# Altium PCB PCB2.PcbDoc
Units mm, origin at the board's own origin, x right, y up, seen from the top; angles counter-clockwise.
Board outline 100 x 76.5 mm, 2 copper layers (Top Layer, Bottom Layer), stack 1.571 mm thick; 101 components, 51 nets, 210 pads, 31 vias.
Unrouted connection lines stored in the file: 5.
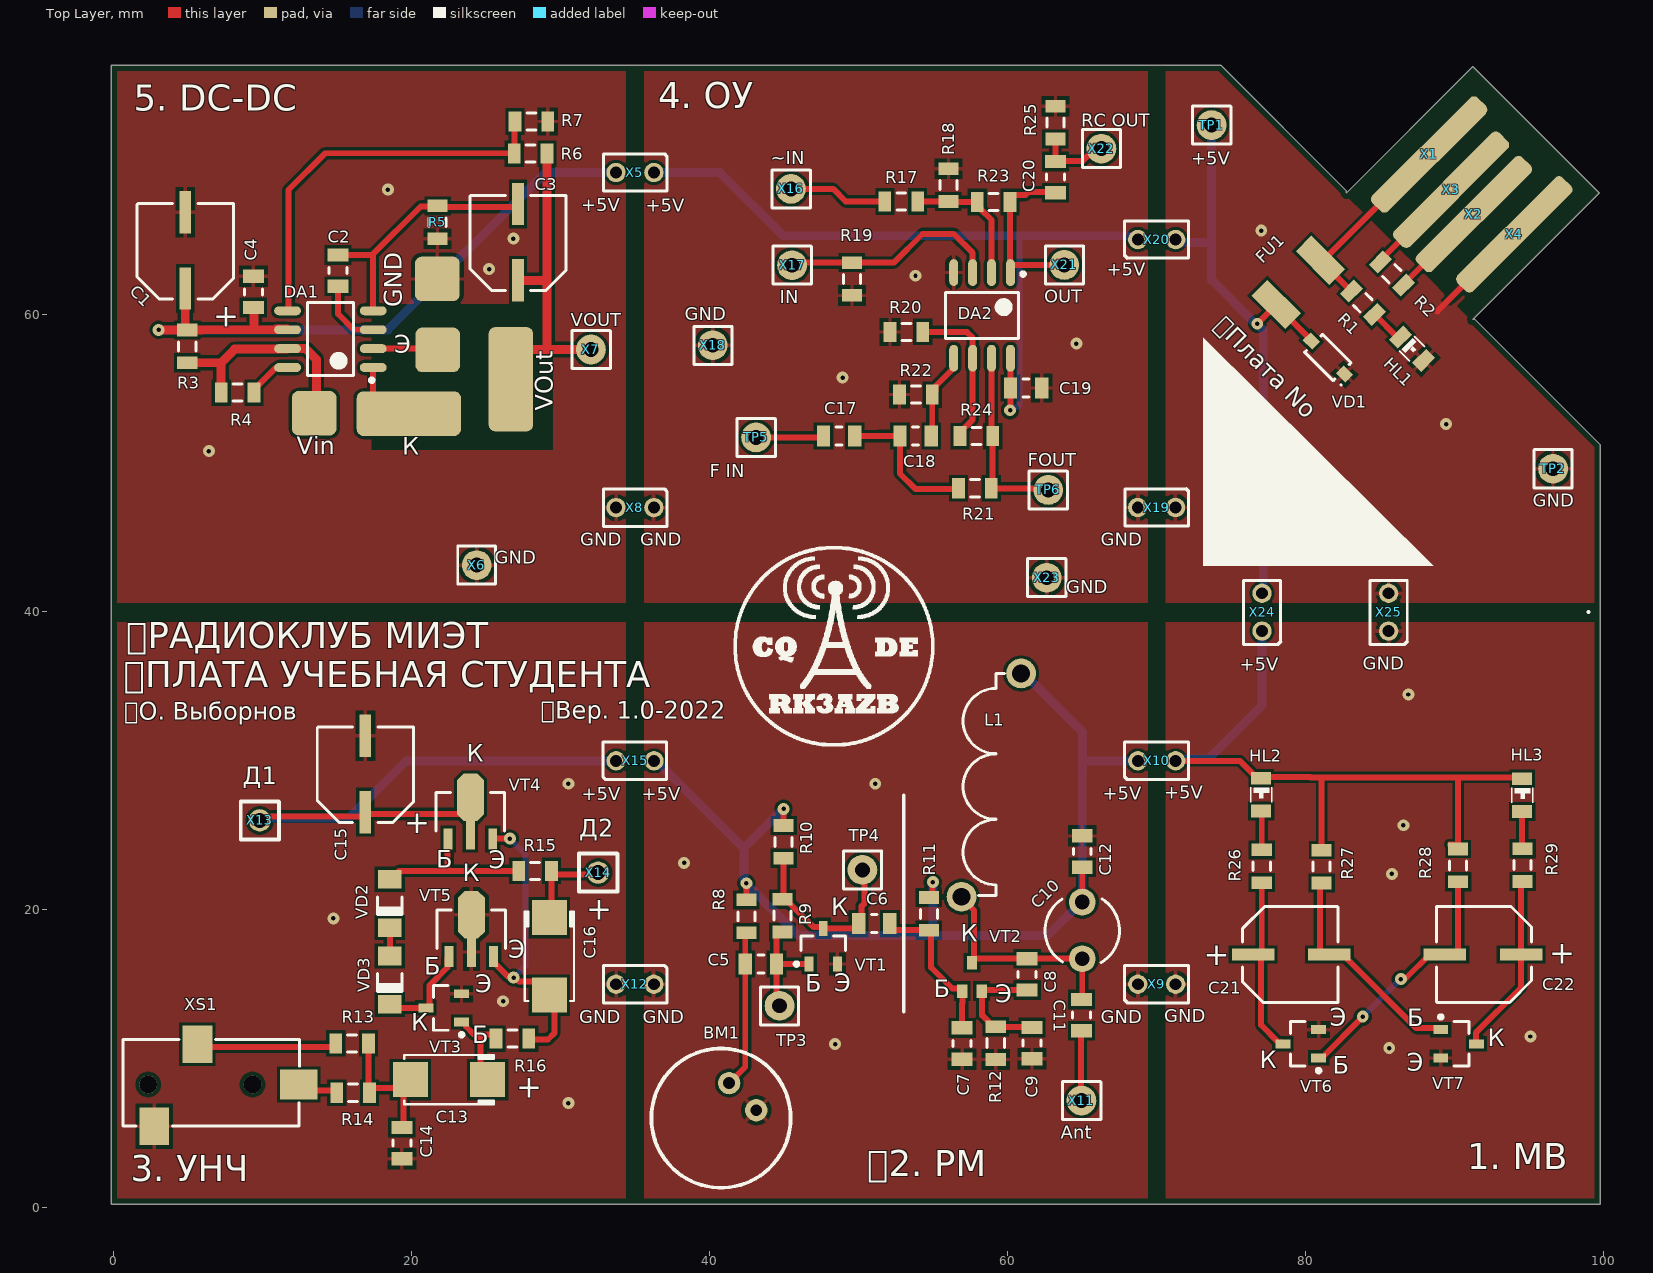
[diagram p0: Top Layer view]
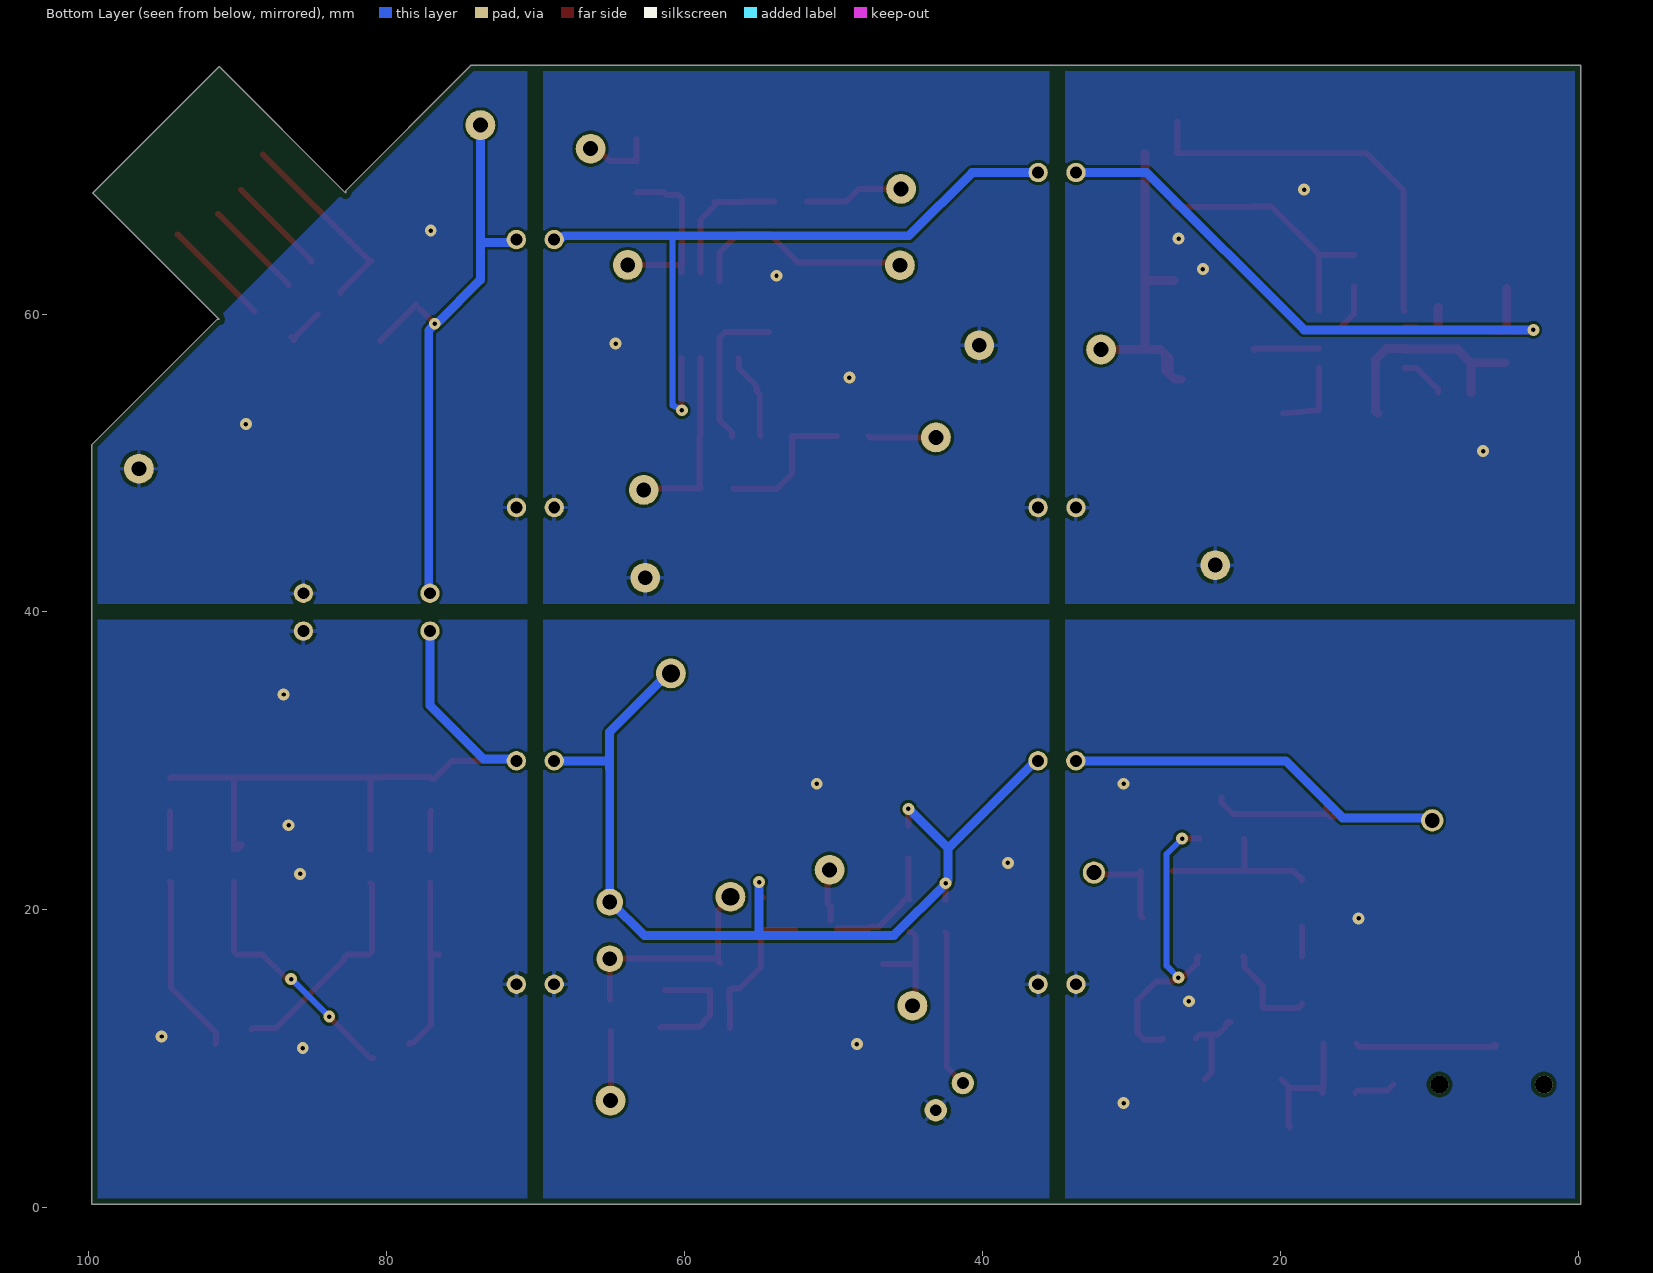
[diagram p1: Bottom Layer view, seen from below]
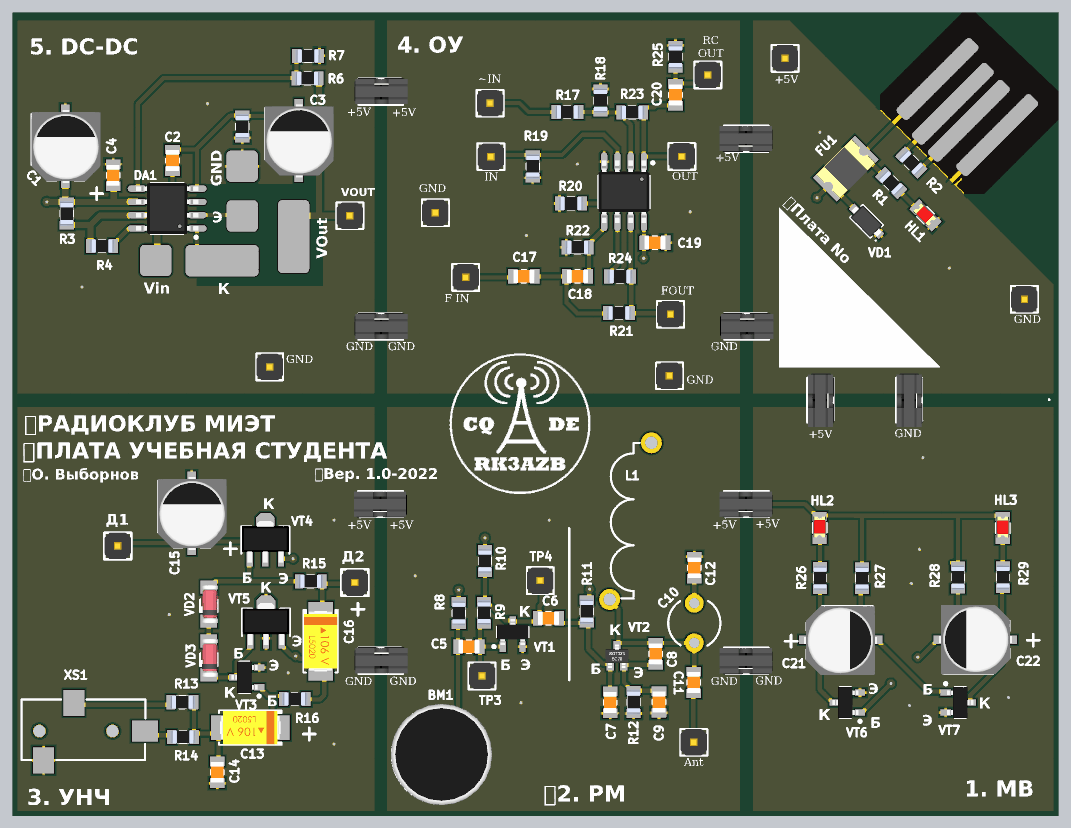
[diagram p2: 3D render of the assembled board from above, using the file's embedded part models]

## Layer stack, top to bottom
Top Solder: solder mask 0.0102, Solder Resist, Dk 3.5
Top Layer: signal copper 0.0356
Dielectric 1: dielectric 1.5, FR-4, Dk 4.8
Bottom Layer: signal copper 0.0356
Bottom Solder: solder mask 0.0102, Solder Resist, Dk 3.5

## Board outline
-0.178,0.214 -0.178,76.713 74.322,76.713 82.766,68.27 82.766,68.128 91.251,76.613 99.736,68.128 91.251,59.642 91.393,59.642 99.822,51.214 99.822,0.214

## Design rules (kind name [scope] priority, off if disabled: settings)
BoardOutlineClearance [All] p1: gap=0.4 ignorepadtopadclearanceinfootprint=FALSE
Clearance [All] p1: gap=0.2 ignorepadtopadclearanceinfootprint=FALSE except(0.125: Arc-Arc Arc-Track Arc-SMDPad Arc-THPad Arc-Via Arc-Text Track-Track Track-SMDPad Track-THPad Track-Via Track-Text SMDPad-Via SMDPad-Text THPad-THPad THPad-Via THPad-Text Via-Via Via-Text Fill-Text Poly-Text Region-Text Text-Text; 0.25: Arc-Hole Track-Hole SMDPad-Hole THPad-Hole Via-Hole Fill-Hole Poly-Hole Region-Hole Text-Hole)
ComponentClearance [All] p1: gap=0 collisioncheckmode=3 verticalgap=0.254 showdistances=FALSE
DiffPairsRouting [All] p1: maxlimit=0.254 minlimit=0.15 mostfreqgap=0.254 toplayer_minwidth=0.2 toplayer_maxwidth=0.381 toplayer_prefwidth=0.254 bottomlayer_minwidth=0.2 bottomlayer_maxwidth=0.381 bottomlayer_prefwidth=0.254 maxuncoupledlength=12.7
HoleSize [All] p1: absolutevalues=TRUE maxlimit=100 minlimit=0.3 maxpercent=80.000 minpercent=20.000
MinimumAnnularRing [All] p1: minimumring=0.15
MinimumSolderMaskSliver [All] p1: minsoldermaskwidth=0.15
PolygonConnect [All] p1: thpad.connectstyle=Relief thpad.reliefconductorwidth=0.254 thpad.reliefentries=4 thpad.polygonreliefangle="90 Angle" thpad.airgapwidth=0.254 smdpad.connectstyle=Relief smdpad.reliefconductorwidth=0.254 smdpad.reliefentries=4 smdpad.polygonreliefangle="90 Angle" smdpad.airgapwidth=0.254 via.connectstyle=Direct via.reliefconductorwidth=0.254 via.reliefentries=4 via.polygonreliefangle="90 Angle" via.airgapwidth=0.254
RoutingVias [All] p1: holewidth=0.4 width=0.8 viastyle="Through Hole" minholewidth=0.3 minwidth=0.8 maxholewidth=0.8 maxwidth=1.27
SilkToSilkClearance [All] p1 off: silktosilkclearance=0.15
SilkToSolderMaskClearance [IsPad] p1: minsilkscreentomaskgap=0.1 clearancetoexposedcopper=TRUE
SolderMaskExpansion [All] p1: expansion=0.102 istentingtop=FALSE
Width [All] p1: maxlimit=1 minlimit=0.125 preferedwidth=0.254
24 further rules are at their usual default settings.

## Classes and differential pairs
component class Amplifier: C13 C14 C15 C16 R13 R14 R15 R16 VD2 VD3 VT3 VT4 VT5 X12 X13 X14 X15 XS1
component class Multivibrator: C21 C22 HL2 HL3 R26 R27 R28 R29 VT6 VT7 X24 X25
component class Operational_amplifier: C17 C18 C19 C20 DA2 R17 R18 R19 R20 R21 R22 R23 R24 R25 TP5 TP6 X16 X17 X18 X19 X20 X21 X22 X23
component class Radio_bug: BM1 C5 C6 C7 C8 C9 C10 C11 C12 L1 R8 R9 R10 R11 R12 TP3 TP4 VT1 VT2 X9 X10 X11
component class DC-DC: C1 C2 C3 C4 DA1 R3 R4 R5 R6 R7 X5 X6 X7 X8
component class USB_Protection: FU1 HL1 R1 R2 TP1 TP2 VD1 X1 X2 X3 X4

## Components (designator, comment, footprint, x,y, rotation, side; value= is the part's Value field where it differs from the comment)
BM1 "EM6050P" EM6050P 42.204,7.369 r315 top
C1 "100 мк" SMD_al_cap_0605_6.3 4.799,61.715 r90 top value=100µF
C2 "680" C_0805 15.054,62.912 r270 top value=0.1µF
C3 "100 мк" SMD_al_cap_0605_6.3 27.138,62.265 r90 top value=100µF
C4 "0,1" C_0805 9.371,61.491 r90 top value=0.1µF
C5 "0,1 мк" C_0805 43.451,16.354 r0 top value=0.1µF
C6 "0,1 мк" C_0805 51.062,19.07 r0 top value=0.1µF
C7 "10n" C_0805 56.963,11.014 r270 top value=0.1µF
C8 "10" C_0805 61.33,15.662 r270 top value=0.1µF
C9 "47" C_0805 61.65,11.045 r270 top value=0.1µF
C10 "КТ4-35" KТ4-35 65.029,20.512 r270 top
C11 "10" C_0805 64.975,12.923 r90 top value=0.1µF
C12 "0,1" C_0805 65.029,23.906 r90 top value=0.1µF
C13 "10мк" C_CASE 23.509,8.592 r180 top value=100µF
C14 "0,033мк" C_0805 19.341,4.327 r90 top value=0.1µF
C15 "100 мк" SMD_al_cap_0605_6.3 16.887,26.559 r90 top value=100µF
C16 "100 мк" C_CASE 29.25,17.875 r270 top value=100µF
C17 "10" C_0805 48.705,51.817 r0 top value=0.1µF
C18 "10" C_0805 53.842,51.814 r0 top value=0.1µF
C19 "0,1" C_0805 61.261,55.035 r0 top value=0.1µF
C20 "0,10" C_0805 63.226,69.195 r90 top value=0.1µF
C21 "100 мк" SMD_al_cap_0605_6.3 76.5,17 r0 top value=100µF
C22 "100 мк" SMD_al_cap_0605_6.3 94.5,17 r180 top value=100µF
DA1 "MC34063" SO-8 14.544,58.311 r180 top
DA2 "LM358" SO-8 58.302,59.911 r270 top
FU1 "MF-MSMF020" "FUSE 1812" 79.467,62.053 r225 top
HL1 "BL-LS0805UHR" LED_0805_RED 87.174,57.667 r315 top
HL2 "BL-LS0805UHR" LED_0805_RED 77.037,27.726 r270 top
HL3 "BL-LS0805UHR" LED_0805_RED 94.568,27.7 r270 top
L1 "Inductor" Inductor 56.922,20.871 r90 top
R1 "1к" R_0805 85.822,62.713 r135 top value="10 к"
R2 "1к" R_0805 83.874,60.757 r315 top value="10 к"
R3 "1" R_0805 4.93,57.83 r90 top value="10 к"
R4 "180" R_0805 8.313,54.721 r0 top value="10 к"
R5 "0" R_0805 21.741,66.164 r90 top value="10 к"
R6 "10 к" R_0805 27.992,70.77 r180 top
R7 "10 к" R_0805 28.042,72.926 r0 top
R8 "10 к" R_0805 42.474,19.562 r270 top
R9 "1М" R_0805 44.899,19.603 r270 top value="10 к"
R10 "4.7к" R_0805 44.975,24.559 r270 top value="10 к"
R11 "22k" R_0805 54.727,19.726 r270 top value="10 к"
R12 "100" R_0805 59.222,11.047 r270 top value="10 к"
R13 "1к" R_0805 16.002,11.03 r0 top value="10 к"
R14 "1к" R_0805 16.072,7.709 r0 top value="10 к"
R15 "510" R_0805 28.294,22.61 r0 top value="10 к"
R16 "100к" R_0805 26.766,11.344 r180 top
R17 "1к" R_0805 52.876,67.557 r180 top value="10 к"
R18 "1к" R_0805 56.044,68.657 r90 top value="10 к"
R19 "0?" R_0805 49.561,62.35 r270 top value="10 к"
R20 "10 к" R_0805 53.22,58.796 r180 top
R21 "10 к" R_0805 57.815,48.304 r0 top
R22 "10 к" R_0805 53.858,54.595 r180 top
R23 "1к" R_0805 59.08,67.521 r180 top value="10 к"
R24 "10 к" R_0805 57.92,51.802 r180 top
R25 "1 к" R_0805 63.226,72.849 r90 top value="10 к"
R26 "300" R_0805 77.081,22.922 r270 top value="10 к"
R27 "27 к" R_0805 81.1,22.9 r270 top value="10 к"
R28 "27 к" R_0805 90.268,22.981 r270 top value="10 к"
R29 "300" R_0805 94.6,23 r270 top value="10 к"
TP1 "Test_Point_1" PLS-1#1 73.713,72.688 r0 top
TP2 "Test_Point_1" PLS-1#1 96.643,49.61 r90 top
TP3 "Test_Point_1" PLS-1#1 44.702,13.553 r270 top
TP4 "Test_Point_1" PLS-1#1 50.264,22.68 r0 top
TP5 "Test_Point_1" PLS-1#1 43.127,51.715 r0 top
TP6 "Test_Point_1" PLS-1#1 62.743,48.187 r0 top
VD1 "SMF7.0A" SOD-123F 81.521,57.081 r135 top
VD2 "1N4148W" SOD-80 18.534,20.423 r270 top
VD3 "1N4148W" SOD-80 18.531,15.269 r270 top
VT1 "BC847" SOT23 47.637,17.553 r90 top
VT2 "PMST2369" SOT-323 57.623,16.437 r180 top
VT3 "BC847" SOT23 22.154,13.41 r180 top
VT4 "BCX54-16,115" SOT89 23.948,26.55 r90 top
VT5 "BCX51-16,115" SOT89 24.009,18.671 r90 top
VT6 "BC847" SOT23 79.7,11 r180 top
VT7 "BC847" SOT23 90.3,11 r0 top
X1 "X" KT_1 88.322,70.713 r225 top
X2 "X" KT_1 91.322,66.713 r45 top
X3 "X" KT_1 89.792,68.346 r45 top
X4 "X" KT_1 94.037,65.348 r45 top
X5 "0 Ом" jumper 35,69.5 r270 top
X6 "КТ" PLS-1#1 24.37,43.137 r90 top
X7 "КТ" PLS-1#1 32.041,57.618 r0 top
X8 "0 Ом" jumper 35,47 r270 top
X9 "0 Ом" jumper 70.025,15 r90 top
X10 "0 Ом" jumper 70.025,30 r90 top
X11 "КТ" PLS-1#1 64.975,7.188 r0 top
X12 "0 Ом" jumper 35,15 r270 top
X13 "КТ" PLS-1#2 9.8,26 r0 top
X14 "КТ" PLS-1#2 32.518,22.494 r0 top
X15 "0 Ом" jumper 35,30 r90 top
X16 "КТ" PLS-1#1 45.468,68.404 r0 top
X17 "КТ" PLS-1#1 45.545,63.278 r0 top
X18 "КТ" PLS-1#1 40.218,57.901 r0 top
X19 "0 Ом" jumper 70.027,47.008 r270 top
X20 "0 Ом" jumper 70.025,65 r90 top
X21 "КТ" PLS-1#1 63.822,63.295 r0 top
X22 "КТ" PLS-1#1 66.313,71.104 r0 top
X23 "КТ" PLS-1#1 62.642,42.295 r0 top
X24 "0 Ом" jumper 77.1,39.975 r180 top
X25 "0 Ом" jumper 85.6,39.975 r180 top
XS1 "CKX3-3.5-26" CKX3-3.5-26 0.612,11.267 r0 top

## Footprints (in the part's own frame and the unit in brackets; to place one, negate y for a bottom-side part, rotate by r counter-clockwise, add the part's x,y. Pads: shape width x height; smd on the part's side, far side on the other; paste and mask are expansions set on the pad)
C_0805 [mm] "Chip Capacitor, 2-Leads, Body 2,00x1,25mm, IPC Medium Density"
  rect 0.9x1.4 smd: 1(-1.05,0) 2(1.05,0)
  silkscreen extent -0.2,-0.6 0.2,0.6, body extent -1,-0.62 1,0.63, height 0.8
C_CASE [mm]
  rect 2.35x2.35 smd: 1(-1.6,0) 2(3.6,0)
  silkscreen extent -2,-1.65 4,1.65, body extent -1.9,-1.6 3.9,1.6, height 2.6
CKX3-3.5-26 [mm]
  rect 2x2.5 smd: 2(2.1,-5.8) 3(5,-0.3)
  rect 2.5x2 smd: 4(11.8,-3)
  round 1.2 hole 1.2: HOLE(1.7,-3) HOLE(8.7,-3)
  silkscreen extent 0,-5.77 11.85,0.03
EM6050P [mm]
  round 1.5 hole 0.8: 1(-1.325,0.075) 2(1.25,0.075)
  silkscreen extent -4.72,-6.65 4.62,2.7, body extent -4.88,-6.77 4.82,2.92, height 5.15
"FUSE 1812" [mm]
  rect 1.5x3.2 smd: 1(-2.2,0) 2(2,0)
  body extent -2.51,-1.6 2.31,1.62, height 1.32
Inductor [mm]
  round 2 hole 1.2: 1(0,0) 2(15,-4)
  silkscreen extent 0.1,-2.88 15,-0.11
jumper [mm] "PLS-2 вилка штыревая 2.54мм 1x2 прямая"
  round 1.3 hole 0.8: 1(0,1.265) 2(0,-1.275)
  silkscreen extent -1.26,-2.12 1.25,2.15, body extent -1.3,-2.51 1.2,2.58, height 16.91
KT_1 [mm]
  rrect50% 10x1.5 smd: 1(0,0)
KТ4-35 [mm]
  round 1.8 hole 1: 1(0,0) 2(3.8,0)
  silkscreen extent -0.22,-2.5 4.06,2.5, body extent -0.7,-2.5 4.3,2.5, height 4.8
LED_0805_RED [mm]
  rect 0.85x1.35 smd: 1(-1.1,0) 2(1.1,0)
  silkscreen extent -0.5,-0.7 0.5,0.7, body extent -1.11,-0.62 0.91,0.63, height 1.1
PLS-1#1 [mm]
  round 2 hole 1: 1(0,0)
  silkscreen extent -1.28,-1.28 1.3,1.28, body extent -1.27,-1.27 1.27,1.27, height 8.44
PLS-1#2 [mm]
  round 1.5 hole 1: 1(0,0)
  silkscreen extent -1.28,-1.28 1.3,1.28, body extent -1.27,-1.27 1.27,1.27, height 8.44
R_0805 [mm] "Chip Resistor, 2-Leads, Body 2,10x1,30mm, IPC Medium Density"
  rect 0.85x1.35 smd: 1(-1.1,0) 2(1.1,0)
  silkscreen extent -0.3,-0.58 0.3,0.57, body extent -1.2,-0.62 1.2,0.63, height 0.55
SMD_al_cap_0605_6.3 [mm]
  rect 2.85x0.8 smd: 1(0,0) 2(5.125,0)
  silkscreen extent -0.7,-3.23 5.7,3.23, body extent -0.97,-3.35 6.03,3.25, height 5.41
SO-8 [mm] "SOIC, 8-Leads, Body 4,90x3,90mm, Pitch 1,27mm, IPC Medium Density"
  oval 1.8x0.6 smd: 1(-2.875,1.905) 2(-2.875,0.635) 3(-2.875,-0.635) 4(-2.875,-1.905) 5(2.875,-1.905) 6(2.875,-0.635) 7(2.875,0.635) 8(2.875,1.905)
  silkscreen extent -2.9,-2.45 1.55,2.88, body extent -3,-2.45 3,2.45, height 1.7
SOD-80 [mm] "MELF Diode, 2-Leads, Body 3,50x1,65mm, IPC Medium Density"
  rect 1.25x1.6 smd: 1(-1.625,0) 2(1.625,0)
  silkscreen extent -0.45,-0.82 0.75,0.83, body extent -1.85,-0.7 1.85,0.9, height 1.6
SOD-123F [mm] "SODFL, 2-Leads, Body 1.60x3.50mm, IPC Medium Density"
  rect 0.9x0.75 smd: 1(-1.575,0) 2(1.575,0)
  silkscreen extent -1.97,-0.85 1.35,0.85, body extent -1.75,-0.85 1.75,0.85, height 1.2
SOT23 [mm] "SOT23, 3-Leads, Body 2,90x2,45mm, Pitch 0,95mm, IPC Medium Density"
  rect 1x0.6 smd: 1(-1.2,0.95) 2(-1.2,-0.95) 3(1.2,0)
  silkscreen extent -1.32,-1.5 0.7,1.92, body extent -1.05,-1.5 1.45,1.5, height 1.05
SOT89 [mm] "SOT89, 3-Leads, Body 4.50x2.45mm, Pitch 1.50mm, Lead Span 4.1mm, IPC Medium Density"
  rect 1.4x0.6 smd: 1(-1.8,1.5) 3(-1.8,-1.5)
  rect 2x0.6 smd: 2(-1.5,0)
  oct 3.2x1.8 smd: 2(1,0)
  silkscreen extent -1.28,-2.3 1.32,2.3, body extent -2.15,-2.25 1.85,2.25, height 1.5
SOT-323 [mm]
  rect 0.7x0.9 smd: 1(0.65,1.9) 2(-0.65,1.9) 3(0,0)
  body extent -1.1,-0.12 1.1,2.12, height 1.1

## Part data
C1 C3 C13 C15 C16 C21 C22: library part TAJB107K004RNJ, "CAP TANT 100UF 10% 4V 1411", Manufacturer="AVX Corporation", Component Type="Tantalum Capacitor", ComponentLink1Description=Datasheet, ComponentLink1URL=http://datasheets.avx.com/TAJ.pdf, Part Number=TAJB107K004RNJ
C2 C4 C5 C6 C7 C8 C9 C11 C12 C17 C18 C19 C20: library part GRM188R72A104KA35D, "CAP CER 0.1UF 100V X7R 0603", Manufacturer="Murata Electronics", Component Type=Capasitor, ComponentLink1Description=Datasheet, ComponentLink1URL=https://www.murata.com/~/media/webrenewal/support/library/catalog/products/capacitor/mlcc/c02e.ashx?la=en-us, Part Number=GRM188R72A104KA35D
C14: library part GRM188R72A104KA35D, Manufacturer="Murata Electronics", Component Type=Capasitor, ComponentLink1Description=Datasheet, ComponentLink1URL=https://www.murata.com/~/media/webrenewal/support/library/catalog/products/capacitor/mlcc/c02e.ashx?la=en-us, Part Number=GRM188R72A104KA35D
R1 R2 R3 R4 R5 R6 R7 R8 R9 R10 R11 R12 R13 R14 R17 R18 R19 R20 R21 R22 R23 R24 R25 R26 R27 R28 R29: library part CR0603-FX-1002ELF, "RES SMD 10K OHM 1% 1/10W 0603", Manufacturer="Bourns Inc.", Component Type=Resistor, ComponentLink1Description=Datasheet, ComponentLink1URL=https://www.bourns.com/pdfs/chpreztr.pdf, Part Number=CR0603-FX-1002ELF
R15: library part CR0603-FX-1002ELF, Manufacturer="Bourns Inc.", Component Type=Resistor, ComponentLink1Description=Datasheet, ComponentLink1URL=https://www.bourns.com/pdfs/chpreztr.pdf, Part Number=CR0603-FX-1002ELF
R16: library part R_C1-4
VD1: library part SMAJ5.0A-TR, "Защитный диод, однонаправленный"
VD2 VD3: library part LL4148-GS08, "Диод"
VT2: library part BC847
VT5: library part BCX51-16,115_1
X1 X2 X3 X4: "Контактная площадка"
X5 X8 X9 X10 X12 X15 X19 X20 X24 X25: library part "0 Ohm (0805)"

## Free pads (board coordinates)
  rrect30% 3x3 smd: 2(13.455,53.34) 2(21.725,62.359) 2(21.751,57.594)
  rrect30% 7x3 smd: 2(19.812,53.312)
  rrect30% 3x7 smd: 2(26.662,55.622)

## Via types
v1: diameter 0.8, hole 0.3, Top Layer to Bottom Layer, tented both sides, 31 vias

## Nets (pads, with @x,y where several pads share a name; then routed paths per layer and width w, separated by ;. In a path a pad name is that pad's centre, name@x,y a point inside that pad or via, vN(x,y) a via of type N, cw(c..) or ccw(c..) an arc to the next point about the centre after c; other vN are vias at no path point)
5V: FU1.2 TP1.1 VD1.2 X20.2 X24.2 | length 40.5
  Top Layer w0.4: TP1.1 73.885,72.516 TP1.1@74.2,72.516 ; v1(76.778,59.35) 77.742,60.313 FU1.2@77.764,60.313 ; FU1.2 78.052,60.594 80.408,58.239 VD1.2
  Bottom Layer w0.6: X20.2@71.675,65 71.86,64.815 73.713,64.815 ; TP1.1 73.713,64.815 ; X24.2 77.18,41.33 77.18,58.898 76.778,59.3 v1(76.778,59.35) 76.724,59.35 76.624,59.45 76.556,59.45 73.713,62.293 73.713,64.815
"+5V via multi": HL2.1 HL3.1 R27.1 R28.1 X10.2 X24.1 | length 47.2
  Top Layer w0.4: X10.2 75.613,30 76.787,28.826 HL2.1 77.113,28.902 80.352,28.902 ; 80.352,28.894 81.1,28.894 ; R27.1 81.1,28.894 ; HL3.1 94.474,28.894 90.268,28.894 ; 81.1,28.894 90.268,28.894 ; R28.1@90.253,24.075 90.128,24.2 89.955,24.373 89.705,24.373 89.83,24.248 90.003,24.075 R28.1@90.253,24.075 ; R28.1@90.253,24.075 90.259,24.081 R28.1 90.268,28.894
  Bottom Layer w0.6: X10.2 71.434,30.134 73.517,30.134 77.1,33.717 X24.1
"+5V via oper_amplifer": C19.1 DA2.8 X5.1 X20.1 | length 49.7
  Top Layer w0.4: v1(60.18,53.543) 60.211,53.574 DA2.8@60.211,57.036
  Bottom Layer w0.4: v1(60.18,53.543) 60.289,53.543 60.486,53.74 60.597,53.74 60.707,53.85 60.825,53.85 60.825,65.208 60.875,65.258
  Bottom Layer w0.6: X5.1 40.696,69.5 44.937,65.258 60.875,65.258 68.117,65.258 X20.1@68.375,65
"+5V via radio_bug": C10.1 C12.1 L1.2 R8.1 R10.1 R11.1 X10.1 X15.2 | length 70.1
  Top Layer w0.4: v1(42.472,21.78) 42.474,21.777 R8.1 ; v1(44.973,26.771) 44.975,26.768 R10.1 ; R11.1 54.838,20.826 54.963,20.951 54.963,21.819 v1(55.001,21.857) ; C10.1 C12.1
  Bottom Layer w0.6: X15.2@36.238,30.298 36.27,30.267 X15.2@36.27,30 ; X15.2 X15.2@36.625,30 ; X15.2@36.531,29.906 42.314,24.123 ; v1@44.961,26.771 42.314,24.123 ; v1(55.001,21.857) 55.001,18.275 ; L1.2 61.106,35.871 65.04,31.938 65.04,30 ; 65.029,29.426 C10.1 64.946,20.512 62.709,18.275 55.001,18.275 ; 65.04,29.471 65.04,30 ; X10.1@68.73,30 65.04,30 ; 42.314,24.123 42.314,21.992 42.472,21.834 v1(42.472,21.78) 42.472,21.759 45.956,18.275 55.001,18.275
C: DA1.1 pad.2@19.812,53.312 | length 5.3
  Top Layer w0.4: DA1.1 17.419,53.544 pad.2@19.812,53.312
E: DA1.2 pad.2@21.751,57.594 | length 4.5
  Top Layer w0.4: DA1.2 21.795,57.676 pad.2@21.751,57.594
GND: BM1.2 C1.2 C4.2 C7.2 C9.2 C12.2 C14.1 C15.2 C19.2 DA2.4 HL1.2 pad.2@21.725,62.359 R5.1 R7.2 R12.2 R18.2 R19.2 R20.2 R22.2 R25.2 TP2.1 VD1.1 VT1.2 VT3.2 VT5.2 VT6.2 VT7.2 X4.1 X6.1 X8.1 X8.2 X9.1 X9.2 X12.1 X12.2 X18.1 X19.1 X19.2 X23.1 X25.1 X25.2 XS1.2 | length 7.3
  Top Layer w0.4: 88.873,60.184 X4.1
  other v1: 30.53,7.015 85.639,10.711 48.429,10.983 95.117,11.49 26.14,13.854 14.743,19.426 85.815,22.406 38.298,23.141 86.59,25.674 30.53,28.46 51.131,28.46 86.928,34.454 6.392,50.801 89.461,52.606 48.936,55.73 64.639,58.009 53.832,62.568 25.197,63.021 26.833,65.065 77.05,65.608 18.407,68.352
NetBM1_1: BM1.1 C5.1 R8.2 | length 10.7
  Top Layer w0.4: BM1.1 42.401,9.44 C5.1 ; C5.1@42.401,16.25 42.401,18.389 R8.2
NetC1_1: C1.1 C4.1 DA1.6 R3.2 X5.2 | length 47.9
  Top Layer w0.6: v1(3.015,58.938) 3.237,58.938 3.24,58.934 4.67,58.934 R3.2@4.799,59.062 ; C1.1 R3.2@4.799,59.062 ; C4.1 9.424,60.387 9.424,59.131 9.531,59.024 ; DA1.6@10.889,58.946 5.899,58.946 5.883,58.93 R3.2 R3.2@4.799,59.062 ; DA1.6@10.889,58.985 11.63,58.985 DA1.6
  Bottom Layer w0.6: v1@3.064,58.938 18.411,58.938 28.973,69.5 X5.2@33.699,69.5
NetC2_2: C2.2 DA1.3 | length 4.7
  Top Layer w0.4: C2.2 15.054,60.015 16.123,58.946 DA1.3
NetC5_2: C5.2 R9.2 TP3.1 VT1.1 | length 7
  Top Layer w0.4: TP3.1@44.501,14.003 C5.2 ; C5.2@44.883,16.353 VT1.1 ; C5.2@44.883,16.354 C5.2 ; R9.2 44.726,18.503 44.501,18.278 C5.2
NetC6_1: C6.1 R9.1 R10.2 TP4.1 VT1.3 | length 13.8
  Top Layer w0.4: R9.1 R9.1@45.004,20.703 ; R10.2 44.975,20.928 45.102,20.801 45.374,20.53 45.374,20.448 46.572,19.25 46.971,18.851 47.539,18.851 VT1.3 C6.1@49.762,18.753 ; C6.1@50.212,19.27 50.212,20.244 50.412,20.444 TP4.1@50.412,22.532 ; TP4.1 TP4.1@50.412,22.532 ; TP4.1 TP4.1@50.412,22.532 ; TP4.1 TP4.1@50.412,22.532 ; TP4.1 TP4.1@50.412,22.532 ; TP4.1 TP4.1@50.412,22.532 ; TP4.1 TP4.1@50.412,22.532 ; TP4.1 TP4.1@50.412,22.532 ; TP4.1 TP4.1@50.412,22.532 ; TP4.1 TP4.1@50.412,22.532 ; TP4.1 TP4.1@50.412,22.532
NetC6_2: C6.2 C7.1 R11.2 VT2.1 | length 10
  Top Layer w0.4: 52.603,18.626 R11.2 54.876,18.477 54.876,16.133 56.298,14.711 56.823,14.711 56.973,14.561 VT2.1 ; C7.1 56.963,13.697 56.973,13.707 VT2.1@56.973,14.637
NetC8_1: C8.1 C10.2 C11.2 L1.1 VT2.3 | length 15
  Top Layer w0.4: L1.1 57.047,20.746 57.231,20.746 57.398,20.58 57.398,20.325 57.772,19.951 VT2.3@57.772,16.712 ; VT2.3 57.772,16.586 VT2.3@57.772,16.712 ; C11.2 65.029,13.973 C10.2 C8.1 VT2.3@57.772,16.712
NetC8_2: C8.2 C9.1 R12.1 VT2.2 | length 8.4
  Top Layer w0.4: C8.2 58.348,14.612 58.304,14.569 58.304,12.913 58.747,12.47 58.747,12.372 58.972,12.147 R12.1 59.248,12.121 61.624,12.121 C9.1
NetC11_1: C11.1 X11.1 | length 4.7
  Top Layer w0.4: X11.1 64.935,7.227 64.935,11.834 C11.1
NetC13_1: C13.1 R16.2 VT3.1 | length 6.1
  Top Layer w0.4: VT3.1 23.554,12.46 23.654,12.36 23.654,12.16 24.199,11.615 24.635,11.615 25.441,11.615 25.666,11.39 R16.2 ; 24.635,11.554 24.635,9.066 C13.1
NetC13_2: C13.2 C14.2 R13.2 R14.2 | length 9.5
  Top Layer w0.4: R13.2 17.102,8.029 19.346,8.029 19.489,8.172 C13.2 ; C14.2 19.468,5.504 C13.2@19.468,8.029 ; R14.2 R14.2@17.172,7.959 ; R14.2 R14.2@17.172,7.959 ; R14.2 R14.2@17.172,7.959
NetC15_1: C15.1 VT4.2 X13.1 X15.1 | length 41.5
  Top Layer w0.4: X13.1 10.01,26.21 10.531,26.21 10.584,26.264 16.687,26.264 16.887,26.464 C15.1@16.887,27.323 ; C15.1 17.019,26.427 23.176,26.427 23.948,27.199 VT4.2@23.948,27.55
  Bottom Layer w0.6: X13.1 9.972,26.172 15.82,26.172 19.648,30 X15.1
NetC16_1: C16.1 R15.2 X14.1 | length 6.3
  Top Layer w0.4: C16.1 29.394,19.619 R15.2@29.394,22.36 ; R15.2 29.394,22.381 32.405,22.381 X14.1
NetC16_2: C16.2 R16.1 VT4.3 VT5.3 | length 20.9
  Top Layer w0.4: VT4.3 25.475,24.778 v1(26.602,24.778) ; VT5.3 25.609,16.771 25.609,16.371 26.454,15.526 26.775,15.526 v1(26.852,15.449) 26.96,15.449 27.224,15.186 28.338,15.186 28.961,14.564 29.583,13.941 29.583,11.717 29.153,11.287 27.923,11.287 R16.1
  Bottom Layer w0.4: v1(26.602,24.778) 27.64,23.74 27.64,16.237 v1(26.852,15.449)
NetC17_1: C17.1 TP5.1 | length 4.6
  Top Layer w0.4: TP5.1 47.552,51.715 C17.1
NetC17_2: C17.2 C18.1 R21.1 | length 9.9
  Top Layer w0.4: C17.2 49.755,51.802 51.268,51.802 ; 51.279,51.814 C18.1 52.792,49.287 53.82,48.259 56.671,48.259 R21.1
NetC18_2: C18.2 DA2.5 R22.1 | length 5.8
  Top Layer w0.4: C18.2 54.956,51.878 54.956,54.594 R22.1 ; R22.1@54.958,54.62 55.183,54.845 55.183,55.165 56.358,56.341 56.358,56.997 DA2.5
NetC20_1: C20.1 DA2.1 R23.1 X21.1 | length 11.6
  Top Layer w0.4: DA2.1@60.18,63.272 R23.1 ; R23.1@60.18,67.771 60.405,67.996 61.214,67.996 61.405,68.188 63.183,68.188 C20.1 ; DA2.1 DA2.1@60.207,63.332 ; DA2.1@60.245,63.327 60.276,63.295 X21.1
NetC20_2: C20.2 R25.1 X22.1 | length 5.8
  Top Layer w0.4: R25.1 C20.2 63.263,70.282 65.058,70.282 65.88,71.104 X22.1 66.435,71.104 X22.1@66.928,70.611
NetC21_1: C21.1 R26.2 VT6.3 | length 12.8
  Top Layer w0.4: C21.1@77.055,16.8 76.855,17 C21.1 76.839,17 77.039,16.8 77.039,12.261 78.2,11.1 78.4,11.1 VT6.3 ; C21.1@77.081,16.8 R26.2
NetC21_2: C21.2 R27.2 VT7.1 | length 15
  Top Layer w0.4: R27.2 80.978,21.678 80.978,17.2 81.178,17 82.65,17 82.85,16.8 82.85,16.664 87.464,12.05 89,12.05 VT7.1
NetC22_1: C22.1 R29.2 VT7.3 | length 12.2
  Top Layer w0.4: VT7.3 91.5,11.059 91.459,11.1 91.459,11.739 94.5,14.781 C22.1 94.5,21.8 R29.2
NetC22_2: C22.2 R28.2 VT6.1 | length 17.1
  Top Layer w0.4: VT6.1 81.1,10.05 83.862,12.812 v1(83.862,12.82) ; v1(86.424,15.338) 86.5,15.415 86.765,15.415 88.35,17 C22.2@89.415,17 ; C22.2 90.068,17 90.268,17.2 R28.2
  Bottom Layer w0.4: v1(83.862,12.82) 86.38,15.338 v1(86.424,15.338)
NetDA1_5: DA1.5 R6.2 R7.1 | length 26.6
  Top Layer w0.4: DA1.5 11.669,60.246 11.732,60.309 11.732,68.337 14.191,70.795 R6.2@26.942,70.795 ; R6.2 26.917,70.795 26.917,72.901 R7.1
NetDA1_8: DA1.8 R4.2 | length 3.1
  Top Layer w0.4: R4.2 9.413,54.971 9.638,55.196 9.677,55.196 10.849,56.368 11.63,56.368 DA1.8
NetDA2_2: DA2.2 R17.1 R18.1 R23.2 | length 9.1
  Top Layer w0.4: R17.1 R18.1 56.08,67.521 R18.1@56.441,67.521 ; R18.1@56.638,67.521 57.755,67.521 57.86,67.416 57.86,67.391 58.205,67.046 58.215,67.046 58.937,66.324 DA2.2 ; R23.2@57.74,67.521 R23.2
NetDA2_3: DA2.3 R19.1 X17.1 | length 15.5
  Top Layer w0.4: X17.1 45.717,63.45 R19.1 52.377,63.45 54.301,65.375 56.398,65.375 57.667,64.106 DA2.3 57.667,62.186 DA2.3@57.655,62.175
NetDA2_6: DA2.6 R20.1 R24.2 | length 10.5
  Top Layer w0.4: R20.1 57.274,58.796 57.667,58.404 DA2.6 57.667,52.899 56.82,52.052 R24.2
NetDA2_7: DA2.7 R21.2 R24.1 TP6.1 | length 12.5
  Top Layer w0.4: R21.2 58.935,48.284 58.987,48.284 58.987,51.77 R24.1 58.937,51.885 DA2.7 ; R21.2@59.156,48.284 62.647,48.284 TP6.1
NetFU1_1: FU1.1 R2.1 X1.1 | length 13.3
  Top Layer w0.4: R2.1@83.096,61.416 R2.1 FU1.1 81.217,63.609 X1.1
NetHL1_1: HL1.1 R2.2 | length 2.7
  Top Layer w0.4: R2.2@84.602,59.979 R2.2 86.186,58.445 HL1.1 HL1.1@86.219,58.268
NetHL2_2: HL2.2 R26.1 | length 2.6
  Top Layer w0.4: HL2.2 77.081,26.582 R26.1
NetHL3_2: HL3.2 R29.1 | length 2.5
  Top Layer w0.4: HL3.2 94.568,24.098 94.57,24.1 R29.1
NetR1_1: R1.1 X2.1 | length 6.7
  Top Layer w0.4: R1.1 86.6,61.991 X2.1
NetR1_2: R1.2 X3.1 | length 6.8
  Top Layer w0.4: R1.2 85.044,63.598 X3.1
NetR13_1: R13.1 XS1.3 | length 10
  Top Layer w0.4: XS1.3 5.553,10.908 5.553,10.79 R13.1@14.677,10.79 ; R13.1@14.677,10.79 14.677,10.805 R13.1 14.902,11.015 R13.1@14.677,10.79
NetR14_1: R14.1 XS1.4 | length 2.8
  Top Layer w0.4: XS1.4 12.809,7.869 14.812,7.869 R14.1
NetR15_1: R15.1 VD2.1 VT4.1 | length 11.1
  Top Layer w0.4: VD2.1@18.534,21.998 18.534,22.073 18.709,22.248 18.784,22.248 19.147,22.61 22.405,22.61 R15.1 ; 22.405,22.626 22.405,24.708 VT4.1
NetR17_2: R17.2 X16.1 | length 6.7
  Top Layer w0.4: X16.1 48.302,68.404 49.149,67.557 R17.2
NetVD2_2: VD2.2 VD3.1 | length 2
  Top Layer w0.4: VD3.1@18.531,16.844 18.533,16.846 18.533,18.846 VD2.2@18.534,18.848
NetVD3_2: VD3.2 VT3.3 VT5.1 | length 6.6
  Top Layer w0.4: VD3.2@18.531,13.694 18.531,13.619 18.706,13.444 18.906,13.444 18.941,13.41 VT3.3 ; VT3.3@21.086,13.41 21.186,13.51 21.186,14.909 22.409,16.132 22.409,16.771 VT5.1
OUT: C3.1 pad.2@26.662,55.622 R6.1 X7.1 | length 23
  Top Layer w0.6: pad.2@26.662,55.622 27.089,55.622 pad.2@27.479,56.012 ; C3.1 29.082,62.265 ; pad.2@27.73,57.045 27.73,56.263 pad.2@27.479,56.012 ; R6.1 29.082,70.76 29.082,62.265 ; X7.1 29.082,57.618 ; pad.2@27.479,56.012 27.479,56.205 27.479,57.045 27.73,57.296 28.047,57.613 28.865,57.613 28.87,57.618 29.082,57.618 ; 29.082,57.618 29.082,62.265
OUT_GND: C2.1 C3.2 DA1.4 R5.2 | length 17.4
  Top Layer w0.4: C2.1 17.349,63.962 17.399,64.012 ; DA1.4 17.399,60.236 17.399,64.012 ; C3.2 27.138,67.374 26.938,67.174 21.83,67.174 R5.2 21.71,67.264 21.671,67.225 20.611,67.225 17.399,64.012
Vin: DA1.7 pad.2@13.455,53.34 R3.1 R4.1 | length 15.1
  Top Layer w0.6: R3.1 7.204,56.73 ; R4.1 7.204,54.73 7.204,56.73 ; pad.2@13.455,53.34 13.604,53.489 13.604,56.964 12.891,57.676 DA1.7 11.635,57.642 8.116,57.642 7.204,56.73
pads on no net: XS1.HOLE

## Polygon pours and split planes (outlines as drawn)
GND on Bottom Layer "NONET_L-01_P-001" (solid, pour order 0): -12.678,83.713 -12.678,-11.787 115.322,-11.787 111.822,39.213 67.322,83.713
GND on Top Layer "NONET_L-01_P-001" (solid, pour order 3): 87.967,60.302 94.693,67.047 95.789,66.155 88.729,59.113
GND on Top Layer "NONET_L-01_P-001" (solid, pour order 2): -18.601,89.29 -18.601,-6.21 109.399,-6.21 105.899,44.79 61.399,89.29

## Other copper
Top Layer:
  pour cut-out: 100.824,39.304 100.824,40.606 -2.487,40.606 -2.487,39.304
  pour cut-out: 17.333,50.902 29.487,50.902 29.487,60.661 17.333,60.661
  pour cut-out: 69.426,76.928 69.426,-0.818 70.648,-0.818 70.648,77.293 69.517,77.293
  pour cut-out: 34.386,77.154 34.386,-0.694 35.606,-0.694 35.606,77.417 34.452,77.417
Bottom Layer:
  pour cut-out: 34.442,77.4 34.442,-0.698 35.503,-0.698 35.503,77.413 34.445,77.413
  pour cut-out: 69.506,77.275 69.506,-0.822 70.568,-0.822 70.568,77.288 69.51,77.288
  pour cut-out: 22.719,39.471 100.817,39.471 100.817,40.533 -2.494,40.533 -2.494,39.471

## Silkscreen, mask and mechanical layers (free items; w line width, h text height)
Top Overlay:
  drawing of 2951 lines, arcs and shapes, not listed
  text "4. ОУ" at 36.567,73.248 h3
  text "5. DC-DC" at 1.336,73.071 h3
  text "RC OUT" at 64.969,72.279 h1.5
  text "~IN" at 44.126,69.772 h1.5
  text "+5V" at 72.344,69.735 h1.5
  text "+5V" at 31.401,66.599 h1.5
  text "+5V" at 35.713,66.572 h1.5
  text "+5V" at 66.686,62.26 h1.5
  text "GND" at 19.753,60.445 h2 r90
  text "OUT" at 62.482,60.444 h1.5
  text "IN" at 44.732,60.41 h1.5
  text "GND" at 38.328,59.282 h1.5
  text "+" at 6.681,59.15 h1.52
  text "VOUT" at 30.678,58.891 h1.5
  text "Плата No" at 73.569,58.832 h2 r315
  text "Э" at 18.826,56.983 h2
  text "VOut" at 29.873,53.519 h2 r90
  text "Vin" at 12.291,50.194 h2
  text "К" at 19.375,50.142 h2
  text "FOUT" at 61.359,49.487 h1.5
  text "F IN" at 40.032,48.745 h1.5
  text "GND" at 95.293,46.747 h1.5
  text "GND" at 31.329,44.142 h1.5
  text "GND" at 35.354,44.142 h1.5
  text "GND" at 66.271,44.141 h1.5
  text "GND" at 25.597,42.928 h1.5
  text "GND" at 63.937,40.944 h1.5
  text "РАДИОКЛУБ МИЭТ" at 0.832,36.98 h3
  text "GND" at 83.869,35.815 h1.5
  text "+5V" at 75.605,35.755 h1.5
  text "ПЛАТА УЧЕБНАЯ СТУДЕНТА" at 0.675,34.378 h3
  text "Вер. 1.0-2022" at 28.669,32.418 h2
  text "О. Выборнов" at 0.708,32.361 h2
  text "К" at 23.699,29.526 h2
  text "Д1" at 8.649,28.029 h2
  text "+5V" at 70.531,27.163 h1.5
  text "+5V" at 66.409,27.074 h1.5
  text "+5V" at 31.434,27.056 h1.5
  text "+5V" at 35.463,27.056 h1.5
  text "+" at 19.491,25.124 h1.52
  text "Д2" at 31.242,24.497 h2
  text "Б" at 21.659,22.432 h2
  text "Э" at 25.167,22.388 h2
  text "К" at 23.432,21.525 h2
  text "+" at 31.71,19.344 h1.52
  text "К" at 48.191,19.216 h2
  text "К" at 56.874,17.452 h2
  text "Э" at 26.475,16.386 h2
  text "+" at 96.372,16.376 h1.52
  text "+" at 73.186,16.288 h1.52
  text "Б" at 20.858,15.221 h2
  text "Б" at 46.416,14.098 h2
  text "Э" at 48.363,14.115 h2
  text "Э" at 24.273,14.064 h2
  text "Б" at 55.063,13.715 h2
  text "Э" at 59.178,13.378 h2
  text "GND" at 70.533,12.136 h1.5
  text "GND" at 35.505,12.093 h1.5
  text "GND" at 31.245,12.075 h1.5
  text "GND" at 66.264,12.081 h1.5
  text "Э" at 81.656,11.825 h2
  text "Б" at 86.855,11.769 h2
  text "К" at 19.966,11.463 h2
  text "Б" at 24.069,10.644 h2
  text "К" at 92.254,10.446 h2
  text "К" at 76.957,8.942 h2
  text "Э" at 86.824,8.795 h2
  text "Б" at 81.849,8.578 h2
  text "+" at 27.036,7.387 h1.52
  text "Ant" at 63.596,4.314 h1.5
  text "1. МВ" at 90.891,2.011 h3
  text "2. РМ" at 50.593,1.535 h3
  text "3. УНЧ" at 1.123,1.192 h3
Top Solder:
  region: 82.822,67.713 90.822,59.713 92.822,59.713 101.322,68.213 91.322,77.713 82.822,69.213
Bottom Solder:
  region: 82.822,67.713 90.822,59.713 92.822,59.713 101.322,68.213 91.322,77.713 82.822,69.213
Board:
  lines w0.15: 82.832,68.203 74.322,76.713 -0.178,76.713 -0.178,0.214 99.822,0.214 99.822,51.214 91.325,59.71 ; 82.838,68.2 91.251,76.613 99.736,68.128 91.315,59.707
V Cut:
  lines w0.4: -0.045,40 99.681,40 ; 35,0.383 35,76.361 ; 70.036,0.665 70.036,76.862